# Altium PCB NRV-MEM-LCD.PCBDOC
Units mil, origin at the board's own origin, x right, y up, seen from the top; angles counter-clockwise.
Board outline 4167 x 1691 mil, 2 copper layers (Top Layer, Bottom Layer), stack 34.8 mil thick; 39 components, 68 nets, 307 pads, 55 vias.
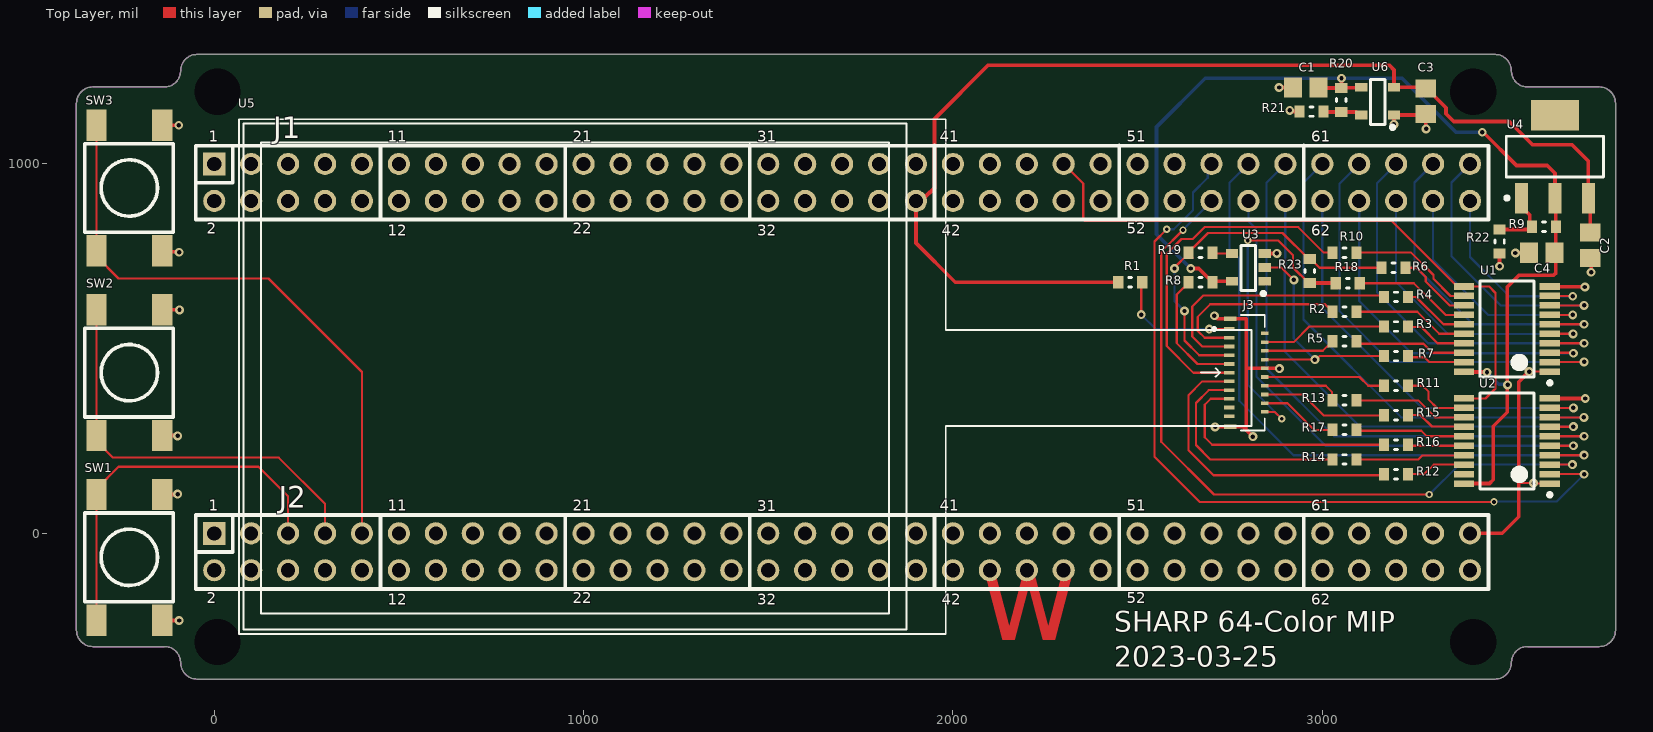
[diagram p0: Top Layer view]
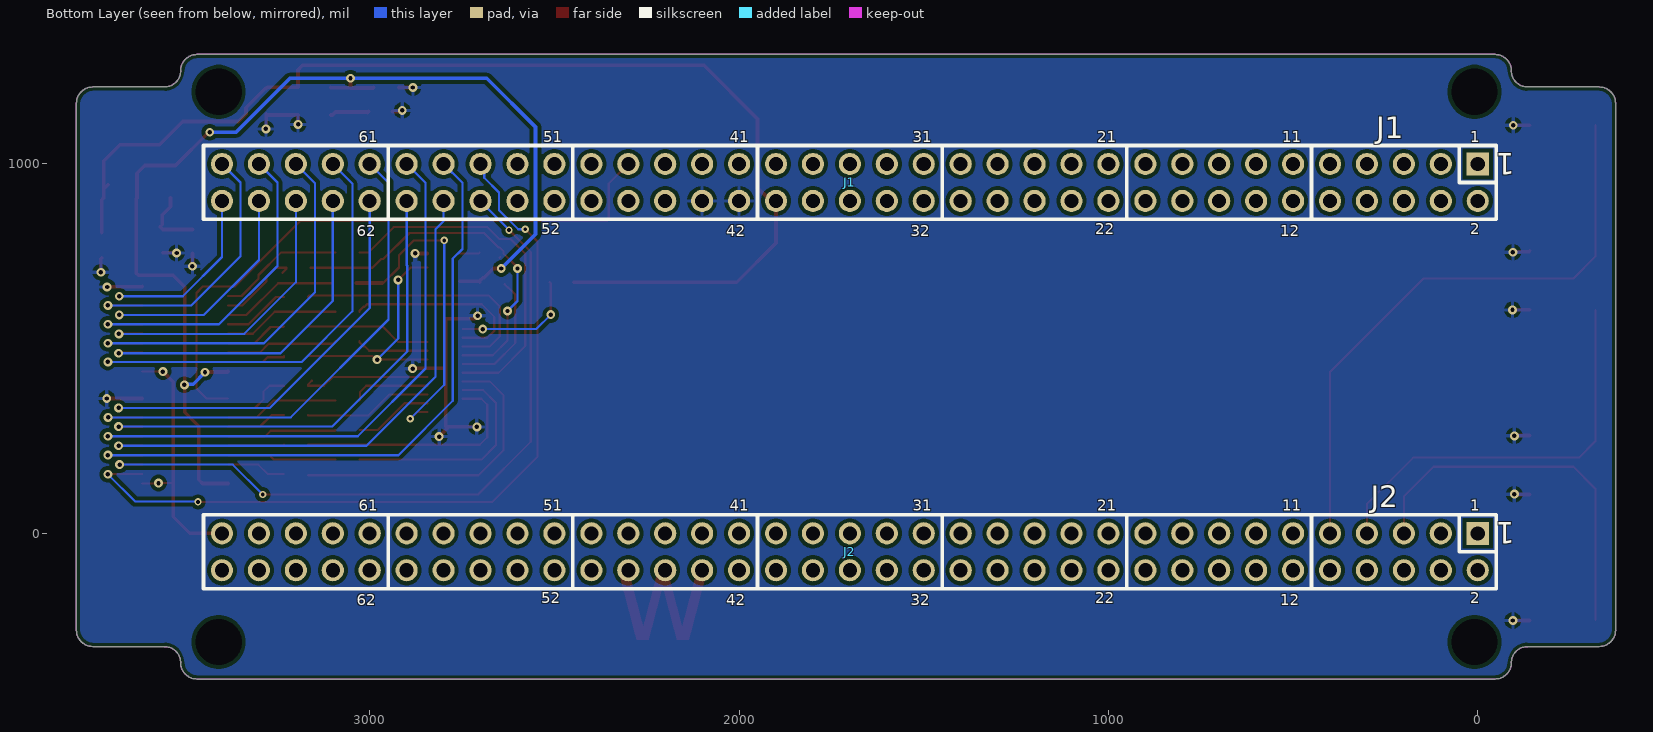
[diagram p1: Bottom Layer view, seen from below]
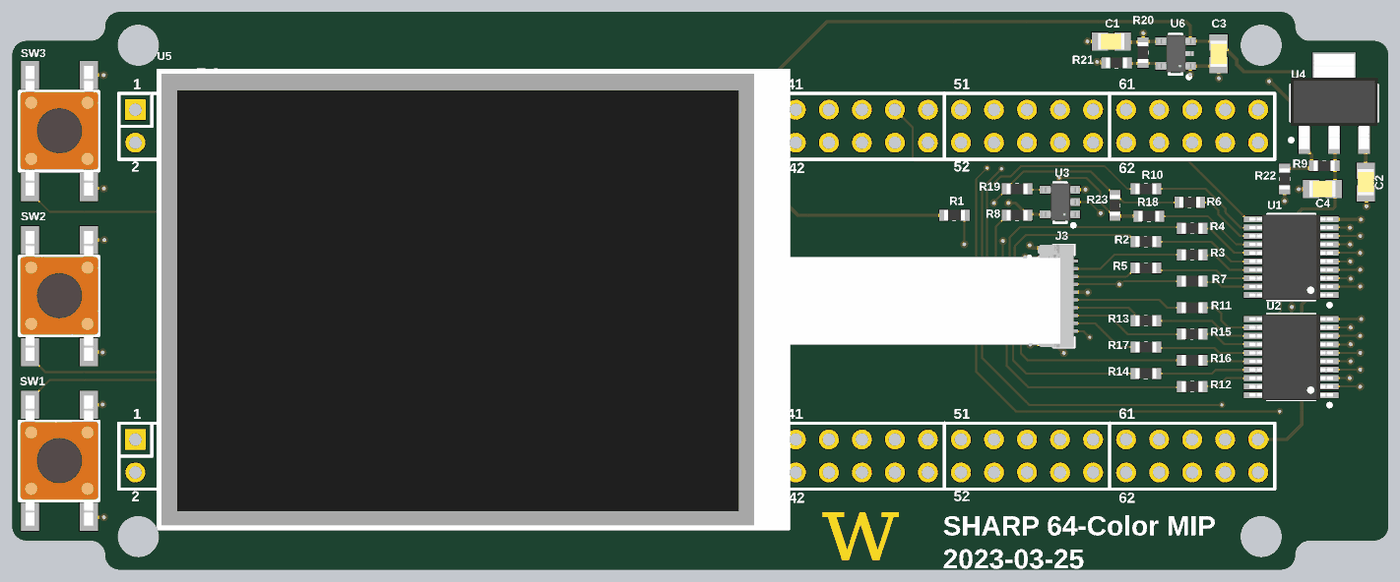
[diagram p2: 3D render of the assembled board from above, using the file's embedded part models]

## Layer stack, top to bottom
Top Solder: solder mask 0.4, Solder Resist, Dk 3.5
Top Layer: signal copper 1.4
Dielectric 3: core 32, Core-042, Dk 4.6
Bottom Layer: signal copper 1.4
Bottom Solder: solder mask 0.4, Solder Resist, Dk 3.5

## Board outline
-329,-306.5 -135,-306.5 cw(c-135,-350.5) -91,-350.5 ccw(c-47,-350.5) -47,-394.5 3468,-394.5 ccw(c3468,-350.5) 3512,-350.5 cw(c3556,-350.5) 3556,-306.5 3750,-306.5 ccw(c3750,-262.5) 3794,-262.5 3794,1164.5 ccw(c3750,1164.5) 3750,1208.5 3556,1208.5 cw(c3556,1252.5) 3512,1252.5 ccw(c3468,1252.5) 3468,1296.5 -47,1296.5 ccw(c-47,1252.5) -91,1252.5 cw(c-135,1252.5) -135,1208.5 -329,1208.5 ccw(c-329,1164.5) -373,1164.5 -373,-262.5 ccw(c-329,-262.5)

## Design rules (kind name [scope] priority, off if disabled: settings)
Clearance [All] p1: gap=6 ignorepadtopadclearanceinfootprint=TRUE except(10: Arc-Poly Track-Poly SMDPad-Poly THPad-Poly Via-Poly Fill-Poly Poly-Poly)
ComponentClearance [All] p1: gap=0 collisioncheckmode=3 verticalgap=0 showdistances=FALSE
DiffPairsRouting [All] p1: maxlimit=6 minlimit=6 mostfreqgap=6 toplayer_minwidth=7 toplayer_maxwidth=7 toplayer_prefwidth=7 bottomlayer_minwidth=7 bottomlayer_maxwidth=7 bottomlayer_prefwidth=7 maxuncoupledlength=500
FabricationTestPointUsage TestPointUsage [All] p1: valid=0 allowmultiple=FALSE
FabricationTestpoint Testpoint [All] p1: side=3 testpointundercomponent=TRUE minsize=40 maxsize=100 preferedsize=60 minholesize=0 maxholesize=40 preferedholesize=32 testpointgrid=1 allowsidetop=TRUE allowsidebottom=TRUE usegrid=TRUE gridtolerance=0.01
HoleSize [All] p1: absolutevalues=TRUE maxlimit=500 minlimit=6 maxpercent=80.000 minpercent=20.000
HoleToHoleClearance [All] p1: gap=0 allowstackedmicrovias=TRUE
MinimumSolderMaskSliver [All] p1: minsoldermaskwidth=0
PlaneClearance [All] p1: clearance=12
PlaneConnect [All] p1: planeconnectstyle=Direct reliefexpansion=12 reliefentries=4 reliefconductorwidth=6 reliefairgap=6
PolygonConnect PolygonConnect_ThermalPad [HoleSize = 18;] p1: connectstyle=Direct reliefconductorwidth=10 reliefentries=4 polygonreliefangle="90 Angle" airgapwidth=10
PolygonConnect [All] p2: connectstyle=Relief reliefconductorwidth=10 reliefentries=4 polygonreliefangle="90 Angle" airgapwidth=10
RoutingVias [All] p1: holewidth=10 width=20 viastyle="Through Hole" minholewidth=6 minwidth=12 maxholewidth=20 maxwidth=50
ShortCircuit ShortCircuit_1 [HasFootprint('4-40 X 250') vs HasFootprint('4-40 X 250')] p1: allowed=TRUE
ShortCircuit [All] p2: allowed=FALSE
SilkToSilkClearance [All] p1: silktosilkclearance=0
SilkToSolderMaskClearance SilkscreenOverComponentPads [IsPad] p1: minsilkscreentomaskgap=1 clearancetoexposedcopper=TRUE
SolderMaskExpansion [All] p1: expansion=2.5 istentingtop=FALSE
Width [All] p1: maxlimit=200 minlimit=5 preferedwidth=6
18 further rules are at their usual default settings.

## Classes and differential pairs
pad class "New Class": U24-25

## Components (designator, comment, footprint, x,y, rotation, side; value= is the part's Value field where it differs from the comment)
C1 "1µF" C0805_1.40MM_MD 2955,1207 r0 top
C2 "10µF" C0805_1.40MM_MD 3725.4,780 r90 top
C3 "1µF" C0805_1.40MM_MD 3280,1170 r90 top
C4 "10µF" C0805_1.40MM_MD 3594.45,760 r0 top
J1 "HDR_2x35" "HEADER 2X35 .100\"" 0,1000 r0 bottom
J2 "HDR_2x35" "HEADER 2X35 .100\"" 0,0 r0 bottom
J3 "5035662102-SHARP" MOLEX_5035662102 2790,435 r270 top
R1 "0" R0603_0.55MM_MD 2480,680 r0 top
R2 "0" R0603_0.55MM_MD 3060,600 r180 top
R3 "0" R0603_0.55MM_MD 3200,560 r0 top
R4 "0" R0603_0.55MM_MD 3200,640 r180 top
R5 "0" R0603_0.55MM_MD 3060,520 r0 top
R6 "0" R0603_0.55MM_MD 3193,719 r180 top
R7 "0" R0603_0.55MM_MD 3200,480 r0 top
R8 "0" R0603_0.55MM_MD 2670,680 r180 top
R9 "10" R0603_0.55MM_MD 3600,830 r0 top value="RES 10.0 OHM 1/10W 1% 0603 SMD"
R10 "0" R0603_0.55MM_MD 3060,760 r180 top
R11 "0" R0603_0.55MM_MD 3200,399.57 r0 top
R12 "0" R0603_0.55MM_MD 3200,160.43 r180 top
R13 "0" R0603_0.55MM_MD 3060,360 r0 top
R14 "0" R0603_0.55MM_MD 3060,200 r180 top
R15 "0" R0603_0.55MM_MD 3200,320 r0 top
R16 "0" R0603_0.55MM_MD 3200,240 r180 top
R17 "0" R0603_0.55MM_MD 3060,280 r0 top
R18 "0" R0603_0.55MM_MD 3069,677 r0 top
R19 "0" R0603_0.55MM_MD 2670,760 r180 top
R20 "10" R0603_0.55MM_MD 3051,1173 r90 top value="RES 10.0 OHM 1/10W 1% 0603 SMD"
R21 "10" R0603_0.55MM_MD 2971,1142 r0 top value="RES 10.0 OHM 1/10W 1% 0603 SMD"
R22 "10" R0603_0.55MM_MD 3480,790 r90 top value="RES 10.0 OHM 1/10W 1% 0603 SMD"
R23 "0" R0603_0.55MM_MD 2966,710 r270 top
SW1 "FSM4JSMATR" FSM4JSMA -230,-65 r180 top
SW2 "FSM4JSMATR" FSM4JSMA -230,435 r180 top
SW3 "FSM4JSMATR" FSM4JSMA -230,935 r180 top
U1 "NLSV8T244DTR2G" TSOP65P640X105-20N 3500,553.11 r180 top value=Manufacturer
U2 "NLSV8T244DTR2G" TSOP65P640X105-20N 3500,250 r180 top value=Manufacturer
U3 "SN74AHC1G04DBVR" SOT95P245X145-5L 2800,720 r180 top
U4 "NCP1117LP" SOT223 3630,1020 r90 top
U5 "=Value" LS021B7DD02 978,420 r0 top
U6 "MP2015AGJE-Z" SOT23-4 3150,1170 r180 top

## Footprints (in the part's own frame and the unit in brackets; to place one, negate y for a bottom-side part, rotate by r counter-clockwise, add the part's x,y. Pads: shape width x height; smd on the part's side, far side on the other; paste and mask are expansions set on the pad)
C0805_1.40MM_MD [mm] "Capacitor - 0805 - Medium Density"
  rect 1.25x1.4 smd: 1(-0.875,0) 2(0.875,0)
  body extent -1,-0.62 1,0.63, height 1.45
FSM4JSMA [mil] "SWITCH TACTILE SPST-NO 0.05A 12V"
  rect 55x85 smd: A(-89,170) A(-89,-170) B(89,170) B(89,-170)
  silkscreen extent -119,-120 121,120, body extent -118,-198 118,196, height 200
"HEADER 2X35 .100\"" [mil]
  rect 62x62 hole 38: 1(0,0)
  round 60 hole 38: 2(0,100) 3(100,0) 4(100,100) 5(200,0) 6(200,100) 7(300,0) 8(300,100) 9(400,0) 10(400,100) 11(500,0) 12(500,100) 13(600,0) 14(600,100) 15(700,0) 16(700,100) 17(800,0) 18(800,100) 19(900,0) 20(900,100) 21(1000,0) 22(1000,100) 23(1100,0) 24(1100,100) 25(1200,0) 26(1200,100) 27(1300,0) 28(1300,100) 29(1400,0) 30(1400,100) 31(1500,0) 32(1500,100) 33(1600,0) 34(1600,100) 35(1700,0) 36(1700,100) 37(1800,0) 38(1800,100) 39(1900,0) 40(1900,100) 41(2000,0) 42(2000,100) 43(2100,0) 44(2100,100) 45(2200,0) 46(2200,100) 47(2300,0) 48(2300,100) 49(2400,0) 50(2400,100) 51(2500,0) 52(2500,100) 53(2600,0) 54(2600,100) 55(2700,0) 56(2700,100) 57(2800,0) 58(2800,100) 59(2900,0) 60(2900,100) 61(3000,0) 62(3000,100) 63(3100,0) 64(3100,100) 65(3200,0) 66(3200,100) 67(3300,0) 68(3300,100) 69(3400,0) 70(3400,100)
  silkscreen extent -50,-50 3450,150
LS021B7DD02 [mil]
  silkscreen extent -911,-693 1830,701, body extent -911,-693 1830,701, height 37
MOLEX_5035662102 [mm]
  rect 0.25x0.72 smd: 1(-3,-1.065) 3(-2.4,-1.065) 5(-1.8,-1.065) 7(-1.2,-1.065) 9(-0.6,-1.065) 11(0,-1.065) 13(0.6,-1.065) 15(1.2,-1.065) 17(1.8,-1.065) 19(2.4,-1.065) 21(3,-1.065)
  rect 0.25x0.52 smd: 2(-2.7,1.365) 4(-2.1,1.365) 6(-1.5,1.365) 8(-0.9,1.365) 10(-0.3,1.365) 12(0.3,1.365) 14(0.9,1.365) 16(1.5,1.365) 18(2.1,1.365) 20(2.7,1.365)
  rect 0.3x0.85 smd: S1(-3.71,-1) S2(3.71,-1)
  silkscreen extent -3.98,-3 3.98,1.38, body extent -3.98,-1.47 3.98,1.38, height 0.94
R0603_0.55MM_MD [mm] "Resistor 0603 Medium Density"
  rect 0.7x0.85 smd: 1(-0.825,0) 2(0.825,0)
  silkscreen extent -0.1,-0.33 0.1,0.33, body extent -0.8,-0.4 0.8,0.4, height 0.55
SOT23-4 [mm] "SOT23, 4-Leads, Body 3.1x2.6mm (max), Pitch 0.95mm, IPC High Density"
  rect 0.85x0.6 smd: 1(-1.125,0.95) 2(-1.125,-0.95) 3(1.125,-0.95) 4(1.125,0.95)
  silkscreen extent -1.15,-1.5 0.5,1.92, body extent -1.38,-1.45 1.32,1.45, height 1.15
SOT95P245X145-5L [mm] "SOT23, 5-Leads, Body 3.1x2.6mm (max), Pitch 0.95mm, IPC High Density"
  rect 0.85x0.6 smd: 1(-1.125,0.95) 2(-1.125,0) 3(-1.125,-0.95) 4(1.125,-0.95) 5(1.125,0.95)
  silkscreen extent -1.15,-1.5 0.5,1.92, body extent -1.38,-1.45 1.32,1.45, height 1.15
SOT223 [mm] "SOT223, 4-Leads, Body 6.7x7.3mm (max), Pitch 2.30mm, IPC High Density"
  rect 2.1x0.9 smd: 1(-2.85,2.3) 2(-2.85,0) 3(-2.85,-2.3)
  rect 2.1x3.3 smd: 4(2.85,0)
  silkscreen extent -2.97,-3.35 1.4,3.42, body extent -3.54,-3.35 3.76,3.35, height 1.75
TSOP65P640X105-20N [mm] "TSOP, 20-Leads, Body 6.50x4.40mm, Pitch 0.65mm, IPC Medium Density"
  rect 1.4x0.45 smd: 1(-2.95,2.925) 2(-2.95,2.275) 3(-2.95,1.625) 4(-2.95,0.975) 5(-2.95,0.325) 6(-2.95,-0.325) 7(-2.95,-0.975) 8(-2.95,-1.625) 9(-2.95,-2.275) 10(-2.95,-2.925) 11(2.95,-2.925) 12(2.95,-2.275) 13(2.95,-1.625) 14(2.95,-0.975) 15(2.95,-0.325) 16(2.95,0.325) 17(2.95,0.975) 18(2.95,1.625) 19(2.95,2.275) 20(2.95,2.925)
  silkscreen extent -3.08,-3.3 1.85,3.82, body extent -3.2,-3.3 3.2,3.3, height 1.05

## Part data
C1 C3: library part GCM21BR71C105KA58K, "CAP CER 1UF 16V X7R 0805", Manufacturer="Murata Electronics", Operating Temperature="-55°C ~ 125°C", Package=0805, Ratings=AEC-Q200, Supplier Part Number 1=490-16269-1-ND, Temperature Coefficient=X7R, Tolerance=±10%, Voltage - Rated=16V, Category=Capacitors, ComponentLink1Description="Datasheet (Internal)", ComponentLink1URL=https://search.murata.co.jp/Ceramy/image/img/A01X/G101/ENG/GCM21BR71C105KA58-01.pdf, ComponentLink2Description="Datasheet (External)", ComponentLink2URL=https://search.murata.co.jp/Ceramy/image/img/A01X/G101/ENG/GCM21BR71C105KA58-01.pdf, Manufacturer Part Number=GCM21BR71C105KA58K, Substitution Notes="1µF , 16V , ±10% , X7R , -55°C ~ 125°C , AEC-Q200 , 0805", Supplier 1=Digikey, Thickness (Max)=1.40MM
C2 C4: library part GCM21BR71A106KE22K, "CAP CER 10UF 10V X7R 0805", Manufacturer="Murata Electronics", Operating Temperature="-55°C ~ 125°C", Package=0805, Ratings=AEC-Q200, Supplier Part Number 1=490-14531-1-ND, Temperature Coefficient=X7R, Tolerance=±10%, Voltage - Rated=10V, Category=Capacitors, ComponentLink1Description="Datasheet (Internal)", ComponentLink1URL=https://search.murata.co.jp/Ceramy/image/img/A01X/G101/ENG/GCM21BR71A106KE22-01.pdf, ComponentLink2Description="Datasheet (External)", ComponentLink2URL=https://search.murata.co.jp/Ceramy/image/img/A01X/G101/ENG/GCM21BR71A106KE22-01.pdf, Manufacturer Part Number=GCM21BR71A106KE22K, Substitution Notes="10µF , 10V , ±10% , X7R , -55°C ~ 125°C , AEC-Q200 , 0805", Supplier 1=Digikey, Thickness (Max)=1.40MM
J1 J2: "2x35 Header .100\"", Supplier Part Number 1=1849-PR20204VBDN-ND, Pricing="1=0.16000, 10=0.15400, 100=0.09510, 500=0.07872, 1000=0.06888, 5000=0.05904, 10000=0.05740 (USD)", RoHS=No, Stock=3387, Supplier 1=Digi-Key
J3: "21 Position FPC Connector Contacts, Bottom 0.012 (0.30mm) Surface Mount, Right Angle", Manufacturer=Molex, Manufacturer Part Number=5035662102, Package=None, Availability="In Stock", Check_prices=https://www.snapeda.com/parts/5035662102/Molex/view-part/6250786/?ref=eda, Price=None, SnapEDA_Link=https://www.snapeda.com/parts/5035662102/Molex/view-part/6250786/?ref=snap
R1 R2 R3 R4 R5 R6 R7 R8 R10 R11 R12 R13 R14 R15 R16 R17 R18 R19 R23: library part ERJ-3GEY0R00V, "RES 0.0 OHM 1/10W JUMP 0603 SMD", Limiting Element Voltage=75, Manufacturer="Panasonic Electronic Components", Maximum Overload Voltage=150, Maximum Working Voltage=0.0V, Package="0603 (1608 Metric)", Package Power="0603  (0.1W)", Power (Watts)="0.1W- 1/10W", Ratings=AEC-Q200, Sort Value Package=603_0, Supplier Package=0603, Supplier Part Number 1=P0.0GCT-ND, Temperature Coefficient=-, Tolerance=Jumper, Category=Resistors, ComponentLink1Description="Internal Datasheet", ComponentLink1URL="datasheets\Panasonic Electronic Components\AOA0000CE1.pdf", ComponentLink2Description="External Datasheet", ComponentLink2URL=http://industrial.panasonic.com/www-data/pdf/AOA0000/AOA0000CE1.pdf, Composition="Thick Film", Features=-, Height=0.55MM, Manufacturer Part Number=ERJ-3GEY0R00V, Number of Terminations=2, Resistance (Ohms)=0, Size / Dimension="0.063\" L x 0.031\" W (1.60mm x 0.80mm)", Sort Value=0, Substitution Notes="0 , Jumper , 0603 , AEC-Q200", Supplier 1=Digi-Key
R9 R20 R21 R22: library part R, "RES 10.0 OHM 1/10W 1% 0603 SMD", ComponentLink1Description=http://industrial.panasonic.com/www-cgi/jvcr13pz.cgi?E+PZ+3+AOA0002+ERJ3EKF10R0V+7+WW, ComponentLink1URL=http://industrial.panasonic.com/www-cgi/jvcr13pz.cgi?E+PZ+3+AOA0002+ERJ3EKF10R0V+7+WW
SW1 SW2 SW3: "SWITCH TACTILE SPST-NO 0.05A 12V", Contact Rating @ Voltage="0.05A @ 12VDC", Manufacturer="TE Connectivity", Operating Force=160gf, Supplier Part Number 1=450-1759-1-ND, Actuator Orientation="Top Actuated", Actuator Type=Standard, Category=Switches, Circuit=SPST-NO, ComponentLink1Description=http://documents.tycoelectronics.com/commerce/DocumentDelivery/DDEController?Action=srchrtrv&DocNm=2-1437565-7&DocType=CD&DocLang=EN, ComponentLink1URL=http://documents.tycoelectronics.com/commerce/DocumentDelivery/DDEController?Action=srchrtrv&DocNm=2-1437565-7&DocType=CD&DocLang=EN, Illumination=Non-Illuminated, Manufacturer Part Number=FSM4JSMATR, Mounting Type="Surface Mount", Outline="6.00mm x 6.00mm", Packaging="Cut Tape (CT)", Pricing 1="1=0.36, 10=0.34, 25=0.2912, 50=0.2474, 100=0.2377, 250=0.21344, 500=0.20374 (USD)", RoHS="RoHS Compliant", Stock 1=35617, Supplier 1=Digi-Key, Switch Function=Off-Mom, Termination Style="Gull Wing"
U1 U2: "NLSV8T244 Series 8 Bit 0.9 to 4.5 V Dual Non Inverting Level Translator-TSSOP-20", Package=None, Availability=Unavailable, Manufacturer Part Number=NLSV8T244DTR2G, Price=None
U3: "IC SINGLE INVERTER GATE SOT23-5", Current - Output High, Low="8mA, 8mA", Current - Quiescent (Max)=1µA, Manufacturer="Texas Instruments", Operating Temperature="-40°C ~ 85°C", Package / Case="SC-74A, SOT-753", Source Part Number=296-1089-1-ND, Supplier Device Package=SOT-23-5, Voltage - Supply="2 V ~ 5.5 V", Category="Integrated Circuits (ICs)", ComponentLink1Description=http://www.ti.com/lit/ds/symlink/sn74ahc1g04.pdf, ComponentLink1URL=http://www.ti.com/lit/ds/symlink/sn74ahc1g04.pdf, Features=-, Logic Level - High="1.5 V ~ 3.85 V", Logic Level - Low="0.5 V ~ 1.65 V", Logic Type=Inverter, Manufacturer Part Number=SN74AHC1G04DBVR, Max Propagation Delay @ V, Max CL="7.5ns @ 5V, 50pF", Mounting Type="Surface Mount", Number of Circuits=1, Number of Inputs=1, Packaging="Cut Tape (CT)", Pricing 1="1=0.49, 10=0.284, 100=0.134, 1000=0.103 (USD)", RoHS="RoHS Compliant", Source=Digikey, Stock 1=17063, Supplier 1=Digi-Key, Supplier Part Number 1=296-1089-1-ND
U4: "LDO Regulator Pos 1A 4-Pin(3+Tab) SOT-223 T/R / IC REG LDO ADJ 1A SOT223", Case/Package=SOT-223, Dropout Voltage=1.3V, Manufacturer="ON Semiconductor", Manufacturer Part Number=NCP1117LPSTADT3G, Max Operating Temperature=125°C, Max Output current=1A, Max Supply Voltage=18V, Min Current Limit=1.1A, Min Input Voltage=-300mV, Min Operating Temperature=0°C, Output Voltage=5V, Package Quantity=4000, Power Supply Rejection Ratio (PSRR)=60dB, Quiescent Current=50uA, Reference Voltage=1.25V, Supplier Part Number 1=NCP1117LPSTADT3GOSCT-ND, Category="Voltage Regulators - Linear", ComponentLink1Description=https://datasheet.ciiva.com/30476/0900766b8124f872-30476979.pdf?src-supplier=RSComponents, ComponentLink1URL=https://datasheet.ciiva.com/30476/0900766b8124f872-30476979.pdf?src-supplier=RSComponents, ComponentLink2Description=https://datasheet.ciiva.com/16468/ncp1117lp-d-16468568.pdf?src-supplier=Future+Electronics, ComponentLink2URL=https://datasheet.ciiva.com/16468/ncp1117lp-d-16468568.pdf?src-supplier=Future+Electronics, ComponentLink3Description=https://datasheet.ciiva.com/8233/ncp1117lp-d-8233564.pdf?src-supplier=Avnet, ComponentLink3URL=https://datasheet.ciiva.com/8233/ncp1117lp-d-8233564.pdf?src-supplier=Avnet, Halogen Free="Halogen Free", Height=1.69mm, Lead Free="Lead Free", Length=6.7mm, Mounting Technology="Surface Mount", Number of Outputs=1, Number of Regulators=1, Output Current=1A, Output Type=Adjustable, Packaging="Tape and Reel", Pins=4, Polarity=Positive, Pricing="1=0.45000, 10=0.38800, 25=0.36240, 100=0.29000, 250=0.26928, 500=0.22784, 1000=0.17606 (USD)", Radiation Hardening=No, Reach SVHC Compliant=Yes, RoHS=Yes, RoHS Compliant=Yes, Series=-, Stock 1=11739, Supplier 1=Digi-Key, Width=3.7mm
U5: library part LS021B7DD02, "LCD Display Module 5.4-in 240xRGBx320 45uW", Manufacturer=Sharp, Manufacturer Part Number=LS021B7DD02, Pricing="480=31.17562, 960=30.71640, 1920=30.07200, 2880=29.21280, 3840=28.56840, 4800=27.49440, 48000=26.85000 (USD)", Supplier 1=Avnet, Supplier Part Number 1=LS021B7DD02
U6: "LDO Voltage Regulators 24V LowQuies Current Linear Regulator", Manufacturer="Monolithic Power Systems", Supplier Part Number 1=1589-1556-1-ND, Category="Voltage Regulators - Linear", Manufacturer Part Number=MP2015AGJE-Z, Pricing="1=1.12000, 10=1.00100, 25=0.94960, 100=0.78020, 250=0.72928, 500=0.64448, 1000=0.50880 (USD)", RoHS=Yes, Stock 1=7147, Supplier 1=Digi-Key

## Free pads (board coordinates)
  round 0 hole 125 unplated: 1(9,-294.5) 1(9,1195.5) 1(3409,-294.5) 1(3409,1195.5)
  round 10 on Mech16: 1(346.14,-1453.09) 1(346.14,-1451.73) 1(346.14,-453.09) 1(346.14,-451.73) 1(445.14,-3327.59) 1(445.14,-2327.59) 1(2096.14,46.91) 1(2096.14,48.27) 1(2195.14,-1827.59) 1(2596.14,46.91) 1(2596.14,48.27) 1(2695.14,-1827.59) 1(3044.98,-2741.04) 1(3044.98,-2739.68) 1(3143.98,-4615.54) 1(4346.14,-1453.09) 1(4346.14,-1451.73) 1(4346.14,-453.09) 1(4346.14,-451.73) 1(4445.14,-3327.59) 1(4445.14,-2327.59)

## Via types
v1: diameter 24, hole 12, Top Layer to Bottom Layer, tented both sides, 49 vias
v2: diameter 20, hole 10, Top Layer to Bottom Layer, tented both sides, 6 vias

## Nets (pads, with @x,y where several pads share a name; then routed paths per layer and width w, separated by ;. In a path a pad name is that pad's centre, name@x,y a point inside that pad or via, vN(x,y) a via of type N, cw(c..) or ccw(c..) an arc to the next point about the centre after c; other vN are vias at no path point)
+3v2: C1.2 C4.2 R8.1 R9.2 R20.2 U1.20 U2.20 U3.5 U4.2 U6.3 | length 3103.8
  Top Layer w10: v1(2644,717) 2665.48,717 2690.75,691.73 2693.7,691.73 2702.48,682.95 R8.1 ; R8.1@2705.08,682.6 U3.5 ; C1.2 2990.97,1205.48 R20.2 ; R20.2@3050.74,1205.74 R20.2 ; v1(3052,1232) 3052,1206.48 R20.2@3051.96,1206.44 ; U6.3 3104.75,1206.44 R20.2@3051.96,1206.44 ; U2.20 3452.84,134.84 3463,145 3463,290 3501,328 3501,667 3533.14,699.14 3626.62,699.14 3632.48,705 R9.2 3632.48,905.32 U4.2 3630,975 3609,996 3526,996 3436,1086 v1(3433,1086) ; U1.20 3384.83,436.98 3445.02,436.98 v1(3446,436) ; R20.2 R20.2@3051.96,1206.44
  Bottom Layer w10: v1(2644,717) 2551,810 2551,1100 2683,1232 v1(3052,1232) 3216,1232 3362,1086 v1(3433,1086) ; v1(3446,436) 3478.09,403.91 3500.09,403.91 v1(3502,402)
B0_32: J3.17 R16.2 | length 654.6
  Top Layer w6: J3.17 2698.13,364.13 2682,348 2682,260 2702,240 R16.2
B1_32: J3.18 R17.1 | length 213.7
  Top Layer w6: J3.18 2905.68,352.32 2978,280 R17.1
BCLK_32: J3.12 R11.1 | length 351.8
  Top Layer w6: J3.12 3100.81,423.19 3124.43,399.57 R11.1 3167.52,402.52 R11.1@3156.74,413.3
BSP_32: J3.11 R10.2 | length 955.8
  Top Layer w6: J3.11 2651,435 2579,507 2579,757 2619,797 2649,797 2681,829 2935,829 3004,760 R10.2
G0_32: J3.15 R14.2 | length 604.1
  Top Layer w6: J3.15 2692.76,387.76 2658,353 2658,239 2697,200 R14.2
G1_32: J3.16 R15.1 | length 347.8
  Top Layer w6: J3.16 2947.06,375.94 3004,319 3166.52,319 R15.1
GCK_32: J3.4 R3.1 | length 341.3
  Top Layer w6: J3.4 2922.68,517.68 2965,560 R3.1
GEN_32: J3.5 R4.2 | length 725.9
  Top Layer w6: J3.5 2675.13,505.87 2648,533 2648,614 2678,644 3163.52,644 R4.2
GND: C1.1 C2.1 C3.1 C4.1 J1.42 J1.44 J3.10 J3.S1 J3.S2 R21.1 R22.1 SW1.A SW2.A SW3.A U1.10 U2.10 U3.3 U6.1 | length 1419.9
  Top Layer w10: SW1.A@-141,-235 -140,-236 v1(-95,-236) ; SW1.A@-141,105 -100,105 v1(-99,106) ; SW2.A@-141,265 -103,265 -102,264 v1(-99,264) ; SW2.A@-141,605 v1(-94,605) ; SW3.A@-141,765 -138,762 -96,762 v1(-95,761) ; SW3.A@-141,1105 v1(-96,1105) ; v1(2708,589) 2715.94,581.06 J3.S1 2794,581.06 2794,446.81 ; v1(2710,288) 2710.94,288.94 J3.S2 2785.06,288.94 ; v1(2812,262) 2785.06,288.94 ; U3.3 2875.4,757.4 2876,758 v1(2877,758) ; v1(2883,1207) C1.1 ; v1(2884,446) 2883.19,446.81 J3.10 2794,446.81 ; v1(2912,1145) 2915,1142 R21.1 ; v1(3194,1107) 3194.29,1107.29 U6.1 3277.05,1132.6 C3.1 3280,1097 3281,1096 v1(3281,1095) ; v1(3480,723) R22.1 ; v1(3523,759) 3524,760 C4.1 ; U2.10 3711.84,365.16 v1(3712,365) ; U1.10 3616.78,667.63 3710.37,667.63 v1(3711,667) ; C2.1 3728,742.95 v1(3728,707) ; 2785.06,288.94 2794,288.94 2794,446.81
GSP_32: J3.3 R2.2 | length 519.4
  Top Layer w6: J3.3 2681.51,529.49 2663,548 2663,586 2697,620 2933,620 3007.52,620 3013.79,613.73 3016.74,613.73 3027.52,602.95 R2.2
INTB_32: J3.6 R5.1 | length 196.3
  Top Layer w6: J3.6 3001.57,494.06 3013.79,506.27 3016.74,506.27 3027.52,517.05 R5.1
NetJ2_5: J2.5 SW1.B | length 1032
  Top Layer w6: SW1.B@-319,-235 -319,105 -319,120 -259,180 120,180 200,100 J2.5
NetJ2_7: J2.7 SW2.B | length 1124.4
  Top Layer w6: SW2.B@-319,605 -319,265 -319,250 -274,205 175,205 300,80 J2.7
NetJ2_9: J2.9 SW3.B | length 1640.6
  Top Layer w6: SW3.B@-319,1105 -319,765 -319,750 -259,690 147,690 400,437 J2.9
NetJ3_1: J3.1 R1.2 | length 343.3
  Top Layer w6: v1(2510,592) 2510,677.52 R1.2 ; v1(2694,553) 2694.06,553.06 J3.1 J3.1
  Bottom Layer w6: v1(2510,592) 2549,553 v1(2694,553)
NetJ3_9: J3.9 R8.2 | length 337.8
  Top Layer w6: R8.2@2634.52,675 2634.52,674.05 2626.74,666.27 2625.79,666.27 2606,646.48 2606,515 2662.38,458.62 J3.9
NetR9_1: R9.1 R22.2 U4.1 | length 180.1
  Top Layer w10: R22.2 3560,822.48 R9.1 3561.89,835.63 3561.89,861.73 3539.45,884.17 U4.1
NetR19_1: R19.1 U3.4 | length 54.3
  Top Layer w6: R19.1 2705.08,757.4 U3.4
NetR20_1: R20.1 R21.2 U6.4 | length 107
  Top Layer w10: R21.2 3005.96,1139.52 3006.96,1140.52 R20.1 3092.87,1140.52 3100.79,1132.6 U6.4
P0_7/FXIO_LCD_DC: J1.50
P0_8/FXIO_LCD_RD: J1.53
P0_9/FXIO_LCD_WR: J1.52
P0_12/FXIO_LCD_CS: J1.51
P0_13/FXIO_LCD_TE: J1.54
P1_11/FXIO_LCD_GPIO/EZH_LCD_D7_CAMERA_D7/I3C1_PUR: J1.48
P2_8/FXIO_D16: J1.55 U2.2 | length 2205.6
  Top Layer w6: v2(2579,823) 2546,790 2546,207 2668,85 v2(3465,85) ; U2.2 3708.57,160.43 v1(3709,160)
  Bottom Layer w6: v2(2579,823) 2598.13,823 2650,874.87 2650,923 2689.67,962.67 2689.67,989.67 J1.55 ; v2(3465,85) 3466,86 3635,86 v1(3709,160)
P2_9/FXIO_D17: J1.56 U2.3 | length 1975.6
  Top Layer w6: v2(2623,821) 2564,762 2564,248 2707,105 v2(3290,105) ; U2.3 v1(3677.32,186.02)
  Bottom Layer w6: v2(2623,821) 2623,822 2700,899 J1.56 ; v2(3290,105) 3371.02,186.02 v1(3677.32,186.02)
P2_9/FXIO_D17__32: R12.1 U2.18 | length 162
  Top Layer w6: R12.1 3276.43,160.43 3302.02,186.02 U2.18
P2_10/FXIO_D18: J1.57 U2.4 | length 1760.8
  Top Layer w6: U2.4 v1(3709,211.61)
  Bottom Layer w6: J1.57 2749,949 2749,770 2775,744 2775,359 2922.39,211.61 v1(3709,211.61)
P2_10/FXIO_D18__32: R14.1 U2.17 | length 296.2
  Top Layer w6: R14.1 3260,200 3271,211 3383.24,211 U2.17
P2_11/FXIO_D19: J1.58 U2.5 | length 1484.3
  Top Layer w6: U2.5 v1(3680,237.2)
  Bottom Layer w6: J1.58 2800,845 2822,823 2822,424 3008.8,237.2 v1(3680,237.2)
P2_11/FXIO_D19__32: R16.1 U2.16 | length 152.5
  Top Layer w6: R16.1 3235.28,237.2 U2.16
P4_0/FC2_I2C_SDA: J1.46
P4_1/FC2_I2C_SCL: J1.45
P4_6/FXIO_LCD_INT: J1.47 U1.11 U2.11 | length 1726.1
  Top Layer w6: J1.47 2353,947 2353,849.51 2356.51,846 3187.43,846 3365.16,668.27 U1.11 3451.73,668.27 3469.21,650.79 3469.21,392.21 3442.16,365.16 U2.11
P4_7/FXIO_LCD_RST: J1.49
P4_12/FXIO_D20: J1.59 U2.6 | length 1603.9
  Top Layer w6: U2.6 v1(3709,262.8)
  Bottom Layer w6: J1.59 2849,949 2849,446 3032.2,262.8 v1(3709,262.8)
P4_12/FXIO_D20__32: R17.2 U2.15 | length 298.5
  Top Layer w6: R17.2 3094.48,278 3268,278 3283.2,262.8 U2.15
P4_13/FXIO_D21: J1.60 U2.7 | length 1337.9
  Top Layer w6: U2.7 3679.45,288.39 v1(3680,288.94)
  Bottom Layer w6: J1.60 2900,726.01 2898.61,724.63 2898.61,492.39 3102.06,288.94 v1(3680,288.94)
P4_13/FXIO_D21__32: R15.2 U2.14 | length 164.5
  Top Layer w6: R15.2 3266,320 3297,289 3383.24,289 U2.14
P4_14/FXIO_D22: J1.61 U2.8 | length 1403.8
  Top Layer w6: U2.8 v1(3708.54,313.98)
  Bottom Layer w6: J1.61 2949,949 2949,579 3214.02,313.98 v1(3708.54,313.98)
P4_14/FXIO_D22__32: R13.2 U2.13 | length 310.4
  Top Layer w6: R13.2 3260,360 3306.02,313.98 U2.13
P4_15/FXIO_D23: J1.62 U2.9 | length 1145.9
  Top Layer w6: U2.9 v1(3680,339.57)
  Bottom Layer w6: J1.62 3000,610 3270.43,339.57 v1(3680,339.57)
P4_15/FXIO_D23__32: R11.2 U2.12 | length 188.5
  Top Layer w6: R11.2 3271.43,399.57 3288,383 3288,362 3310.43,339.57 U2.12
P4_16/FXIO_D24: J1.63 U1.2 | length 1232.7
  Top Layer w6: U1.2 3708.54,463.54 v1(3709,464)
  Bottom Layer w6: J1.63 3047,947 3047,601 3184,464 v1(3709,464)
P4_16/FXIO_D24__32: R7.2 U1.19 | length 160.6
  Top Layer w6: R7.2 3232.48,477.05 3232.53,477 3277,477 3290.46,463.54 U1.19 U1.19@3383.4,464
P4_17/FXIO_D25: J1.64 U1.3 | length 974.2
  Top Layer w6: U1.3 3678.27,489.13 v1(3680,487.4)
  Bottom Layer w6: J1.64 3100,629 3241.6,487.4 v1(3680,487.4)
P4_17/FXIO_D25__32: R5.2 U1.18 | length 304.2
  Top Layer w6: R5.2 3099.48,513 3274,513 3297.87,489.13 U1.18
P4_18/FXIO_D26: J1.65 U1.4 | length 1079.7
  Top Layer w6: U1.4 v1(3709,514.72)
  Bottom Layer w6: J1.65 3148,948 3148,653 3286.28,514.72 v1(3709,514.72)
P4_18/FXIO_D26__32: R3.2 U1.17 | length 170.1
  Top Layer w6: R3.2 3233.98,558.5 3268.5,558.5 3312.28,514.72 U1.17
P4_19/FXIO_D27: J1.66 U1.5 | length 820
  Top Layer w6: U1.5 3678.69,540.31 v1(3679,540)
  Bottom Layer w6: J1.66 3200,680 3340,540 v1(3679,540)
P4_19/FXIO_D27__32: R2.1 U1.16 | length 316.1
  Top Layer w6: R2.1 3257,600 3316.69,540.31 U1.16
P4_20/FXIO_D28: J1.67 U1.6 | length 914.1
  Top Layer w6: U1.6 v1(3709,565.91)
  Bottom Layer w6: J1.67 3250,950 3250,724 3408.09,565.91 v1(3709,565.91)
P4_20/FXIO_D28__32: R4.1 U1.15 | length 182.1
  Top Layer w6: R4.1 3254,640 3328.09,565.91 U1.15
P4_21/FXIO_D29: J1.68 U1.7 | length 661.4
  Top Layer w6: U1.7 v1(3678,591.5)
  Bottom Layer w6: J1.68 3300,740 3448.5,591.5 v1(3678,591.5)
P4_21/FXIO_D29__32: R18.2 U1.14 | length 317.8
  Top Layer w6: R18.2 3248,677 3333.5,591.5 U1.14
P4_22/FXIO_D30: J1.69 U1.8 | length 777.7
  Top Layer w6: U1.8 3708.91,617.09 v1(3709,617)
  Bottom Layer w6: J1.69 3350,950 3350,750 3483,617 v1(3709,617)
P4_22/FXIO_D30__32: R6.1 U1.13 | length 222.9
  Top Layer w6: R6.1@3225.48,716.05 R6.1@3236.26,705.27 ; R6.1 3255,719 3280,694 3280,682 3344.91,617.09 U1.13
P4_23/FXIO_D31: J1.70 U1.9 | length 536
  Top Layer w6: U1.9 3677.32,642.68 v1(3678,642)
  Bottom Layer w6: J1.70 3400,748 3506,642 v1(3678,642)
P4_23/FXIO_D31__32: R10.1 U1.12 | length 346.2
  Top Layer w6: R10.1 3240.59,760 3301,699.59 3301,688.98 3347.3,642.68 U1.12
R0_32: J3.13 R12.2 | length 832
  Top Layer w6: J3.13 2675.38,411.38 2638,374 2638,225 2705.52,157.48 R12.2@3167.52,157.48
R1_32: J3.14 R13.1 | length 212.7
  Top Layer w6: J3.14 3009.34,399.57 3026.69,382.22 3026.69,360.83 R13.1
USB_VBUS: C2.2 C3.2 J1.40 R1.1 U4.3 U6.2 | length 3145.4
  Top Layer w10: R1.1 2006,680 1900,786 J1.40 1913.53,900 1936.32,922.79 1937.93,922.79 1950,934.86 1950,1122 2095,1267 3182,1267 3194.29,1254.71 U6.2 3277.05,1207.4 C3.2 3282.95,1204.45 3335,1152.4 3335,1136 3356,1115 3506,1115 3569,1052 3676,1052 3720.55,1007.45 U4.3@3720.55,931.42 ; U4.3@3707.83,944.13 U4.3@3720.55,931.42 ; C2.2 3725.4,902.94 U4.3 U4.3@3720.55,931.42
VA_32: J3.8 R7.1 U3.2 | length 659.7
  Top Layer w6: J3.8 v1(2980,470.43) 2983.57,470.43 2993.13,480 R7.1 ; U3.2 2889,720 v1(2923,686)
  Bottom Layer w6: v1(2923,686) 2923,527.43 v1(2980,470.43)
VB_32: J3.7 R6.2 R19.2 R23.1 | length 990.3
  Top Layer w6: v1(2600,717) 2600,719.53 2637.52,757.05 R19.2 2637.52,762.95 2648.3,773.73 2651.25,773.73 2690.52,813 2892.53,813 2963.05,742.48 R23.1 2968.95,742.48 2992.43,719 R6.2 ; v1(2627,602) 2627,522 2666.76,482.24 J3.7 ; R19.2@2646.57,748 R19.2@2648.3,746.27
  Bottom Layer w6: v1(2600,717) 2600,629 v1(2627,602)
VCOM_32: J3.20 R18.1 R23.2 | length 881.3
  Top Layer w6: v2(2798,793) 2881,793 2921,753 2921,719.57 2963.05,677.52 R23.2 ; J3.20 2871.3,328.7 v2(2890,310)
  Top Layer w10: R23.2 3036,677.52 R18.1
  Bottom Layer w6: v2(2798,793) 2798,402 v2(2890,310)
VDD: J2.69 U1.1 U2.1 | length 696
  Top Layer w6: 3532,136 v1(3572,136) 3573.16,134.84 U2.1 ; v1(3560,437.95) U1.1
  Top Layer w10: J2.69 3487,0 3532,45 3532,136 3532,409.95 v1(3560,437.95)
pads on no net: J1.1 J1.2 J1.3 J1.4 J1.5 J1.6 J1.7 J1.8 J1.9 J1.10 J1.11 J1.12 J1.13 J1.14 J1.15 J1.16 J1.17 J1.18 J1.19 J1.20 J1.21 J1.22 J1.23 J1.24 J1.25 J1.26 J1.27 J1.28 J1.29 J1.30 J1.31 J1.32 J1.33 J1.34 J1.35 J1.36 J1.37 J1.38 J1.39 J1.41 J1.43 J2.1 J2.2 J2.3 J2.4 J2.6 J2.8 J2.10 J2.11 J2.12 J2.13 J2.14 J2.15 J2.16 J2.17 J2.18 J2.19 J2.20 J2.21 J2.22 J2.23 J2.24 J2.25 J2.26 J2.27 J2.28 J2.29 J2.30 J2.31 J2.32 J2.33 J2.34 J2.35 J2.36 J2.37 J2.38 J2.39 J2.40 J2.41 J2.42 J2.43 J2.44 J2.45 J2.46 J2.47 J2.48 J2.49 J2.50 J2.51 J2.52 J2.53 J2.54 J2.55 J2.56 J2.57 J2.58 J2.59 J2.60 J2.61 J2.62 J2.63 J2.64 J2.65 J2.66 J2.67 J2.68 J2.70 J3.2 J3.19 J3.21 U2.19 U3.1 U4.4

## Polygon pours and split planes (outlines as drawn)
GND on Bottom Layer "GND_L02_P000" (solid, remove dead copper, pour order 0): 4048,1537 4048,-728 -786,-728 -786,1537

## Keep-outs
Keep-Out Layer:
  the board outline again, w1

## Other copper
Top Layer:
  text "w" at 2076,-366 h400

## Silkscreen, mask and mechanical layers (free items; w line width, h text height)
Top Overlay:
  lines w10: -49.7,-50.43 50,-50.43 50,49.4 ; -49.7,949.57 50,949.57 50,1049.4 ; 50,1049.5 50.04,1049.5 ; 450,-149.4 450,50 ; 450,850 450,1049.4 ; 950,-149.4 950,50 ; 950,850 950,1049.4 ; 1450,-149.4 1450,50 ; 1450,850.6 1450,1050 ; 1950,-149.4 1950,50 ; 1950,850.6 1950,1050 ; 2450,-149.4 2450,50 ; 2450,850.6 2450,1050 ; 2950,-149.4 2950,50 ; 2950,850.6 2950,1050 ; -50,-150.5 -50,49.5 3450,49.5 3450,-150.5 -50,-150.5 ; -50,849.5 3450,849.5 3450,1049.5 -50,1049.5 -50,849.5
  text "1" at -15,1050 h50
  text "J1" at 160,1050 h100
  text "11" at 470,1050 h50
  text "21" at 970,1050 h50
  text "31" at 1470,1049.4 h50
  text "41" at 1965,1050 h50
  text "51" at 2470,1049.5 h50
  text "61" at 2970,1050 h50
  text "2" at -20,800 h50
  text "22" at 970,800 h50
  text "52" at 2470,800 h50
  text "12" at 470,795 h50
  text "32" at 1470,795 h50
  text "42" at 1970,795 h50
  text "62" at 2970,795 h50
  text "1" at -15,50.21 h50
  text "11" at 470,50.21 h50
  text "21" at 970,50.21 h50
  text "41" at 1965,50.21 h50
  text "61" at 2970,50.21 h50
  text "J2" at 175,49.5 h100
  text "31" at 1470,49.61 h50
  text "51" at 2470,49.71 h50
  text "2" at -20,-199.79 h50
  text "22" at 970,-199.79 h50
  text "52" at 2470,-199.79 h50
  text "12" at 470,-204.79 h50
  text "32" at 1470,-204.79 h50
  text "42" at 1970,-204.79 h50
  text "62" at 2970,-204.79 h50
  text "SHARP 64-Color MIP  / 2023-03-25" at 2437,-380 h95
Bottom Overlay:
  lines w10: 450,-150 450,50 ; 450,850 450,1050 ; 950,-150 950,50 ; 950,850 950,1050 ; 1450,-150 1450,50 ; 1450,850 1450,1050 ; 1950,-150 1950,50 ; 1950,850 1950,1050 ; 2450,850 2450,1050 ; 2950,850 2950,1050 ; 2450,-150 2450,50 2450,-150 ; 2950,-150 2950,50 2950,-150
  text "J1" at 275,1050 h100
  text "1" at 20,1048.59 h50
  text "11" at 530,1048.59 h50
  text "21" at 1030,1048.59 h50
  text "31" at 1530,1048.59 h50
  text "41" at 2025,1048.59 h50
  text "51" at 2530,1048.59 h50
  text "61" at 3030,1048.59 h50
  text "2" at 20,798.59 h50
  text "22" at 1035,798.59 h50
  text "52" at 2535,798.59 h50
  text "12" at 535,793.59 h50
  text "32" at 1535,793.59 h50
  text "42" at 2035,793.59 h50
  text "62" at 3035,793.59 h50
  text "1" at 20,50 h50
  text "J2" at 290,50 h100
  text "11" at 530,50 h50
  text "21" at 1030,50 h50
  text "31" at 1530,50 h50
  text "41" at 2025,50 h50
  text "51" at 2530,50 h50
  text "61" at 3030,50 h50
  text "2" at 20,-200 h50
  text "22" at 1035,-200 h50
  text "52" at 2535,-200 h50
  text "12" at 535,-205 h50
  text "32" at 1535,-205 h50
  text "42" at 2035,-205 h50
  text "62" at 3035,-205 h50
Top Solder:
  text "w" at 2076,-366 h400
[8] Board Outline:
  the board outline again, w1
Mechanical 13:
  circle w5: c99,-1826 r21.54
  circle w5: c99,-1925.5 r21.54
  circle w5: c99,-825.5 r21.54
  circle w5: c99,-925.5 r21.54
  circle w5: c108,-630 r62.4
  circle w5: c108,-2120 r62.4
  circle w5: c3508,-2120 r62.5
  circle w5: c3508,-630 r62.4
  circle w5: c0,49.86 r21.54
  circle w5: c0,-49.64 r21.54
  circle w5: c0,1050.36 r21.54
  circle w5: c0,950.36 r21.54
  circle w5: c9,1245.86 r62.4
  circle w5: c9,-244.14 r62.4
  circle w5: c3409,-244.14 r62.5
  circle w5: c3409,1245.86 r62.4
  text "1" at -5,1033.86 h50
  text "2" at -7.03,933.86 h50
  text "1" at -9,34.86 h50
  text "2" at -11.03,-65.14 h50
  text "1" at 94,-842 h50
  text "2" at 91.97,-942 h50
  text "1" at 90,-1841 h50
  text "2" at 87.97,-1941 h50

## Text inside footprints (layer, text, board x,y; h text height)
J1: Bottom Overlay "1" at -100,1050 h100 r180
J2: Bottom Overlay "1" at -100,50 h100 r180